# Altium PCB JLB_PCB.PcbDoc
Units mm, origin at the board's own origin, x right, y up, seen from the top; angles counter-clockwise.
Board outline 170 x 135 mm, 2 copper layers (Top Layer, Bottom Layer), stack 1.586 mm thick; 182 components, 147 nets, 745 pads, 0 vias.
Unrouted connection lines stored in the file: 470.
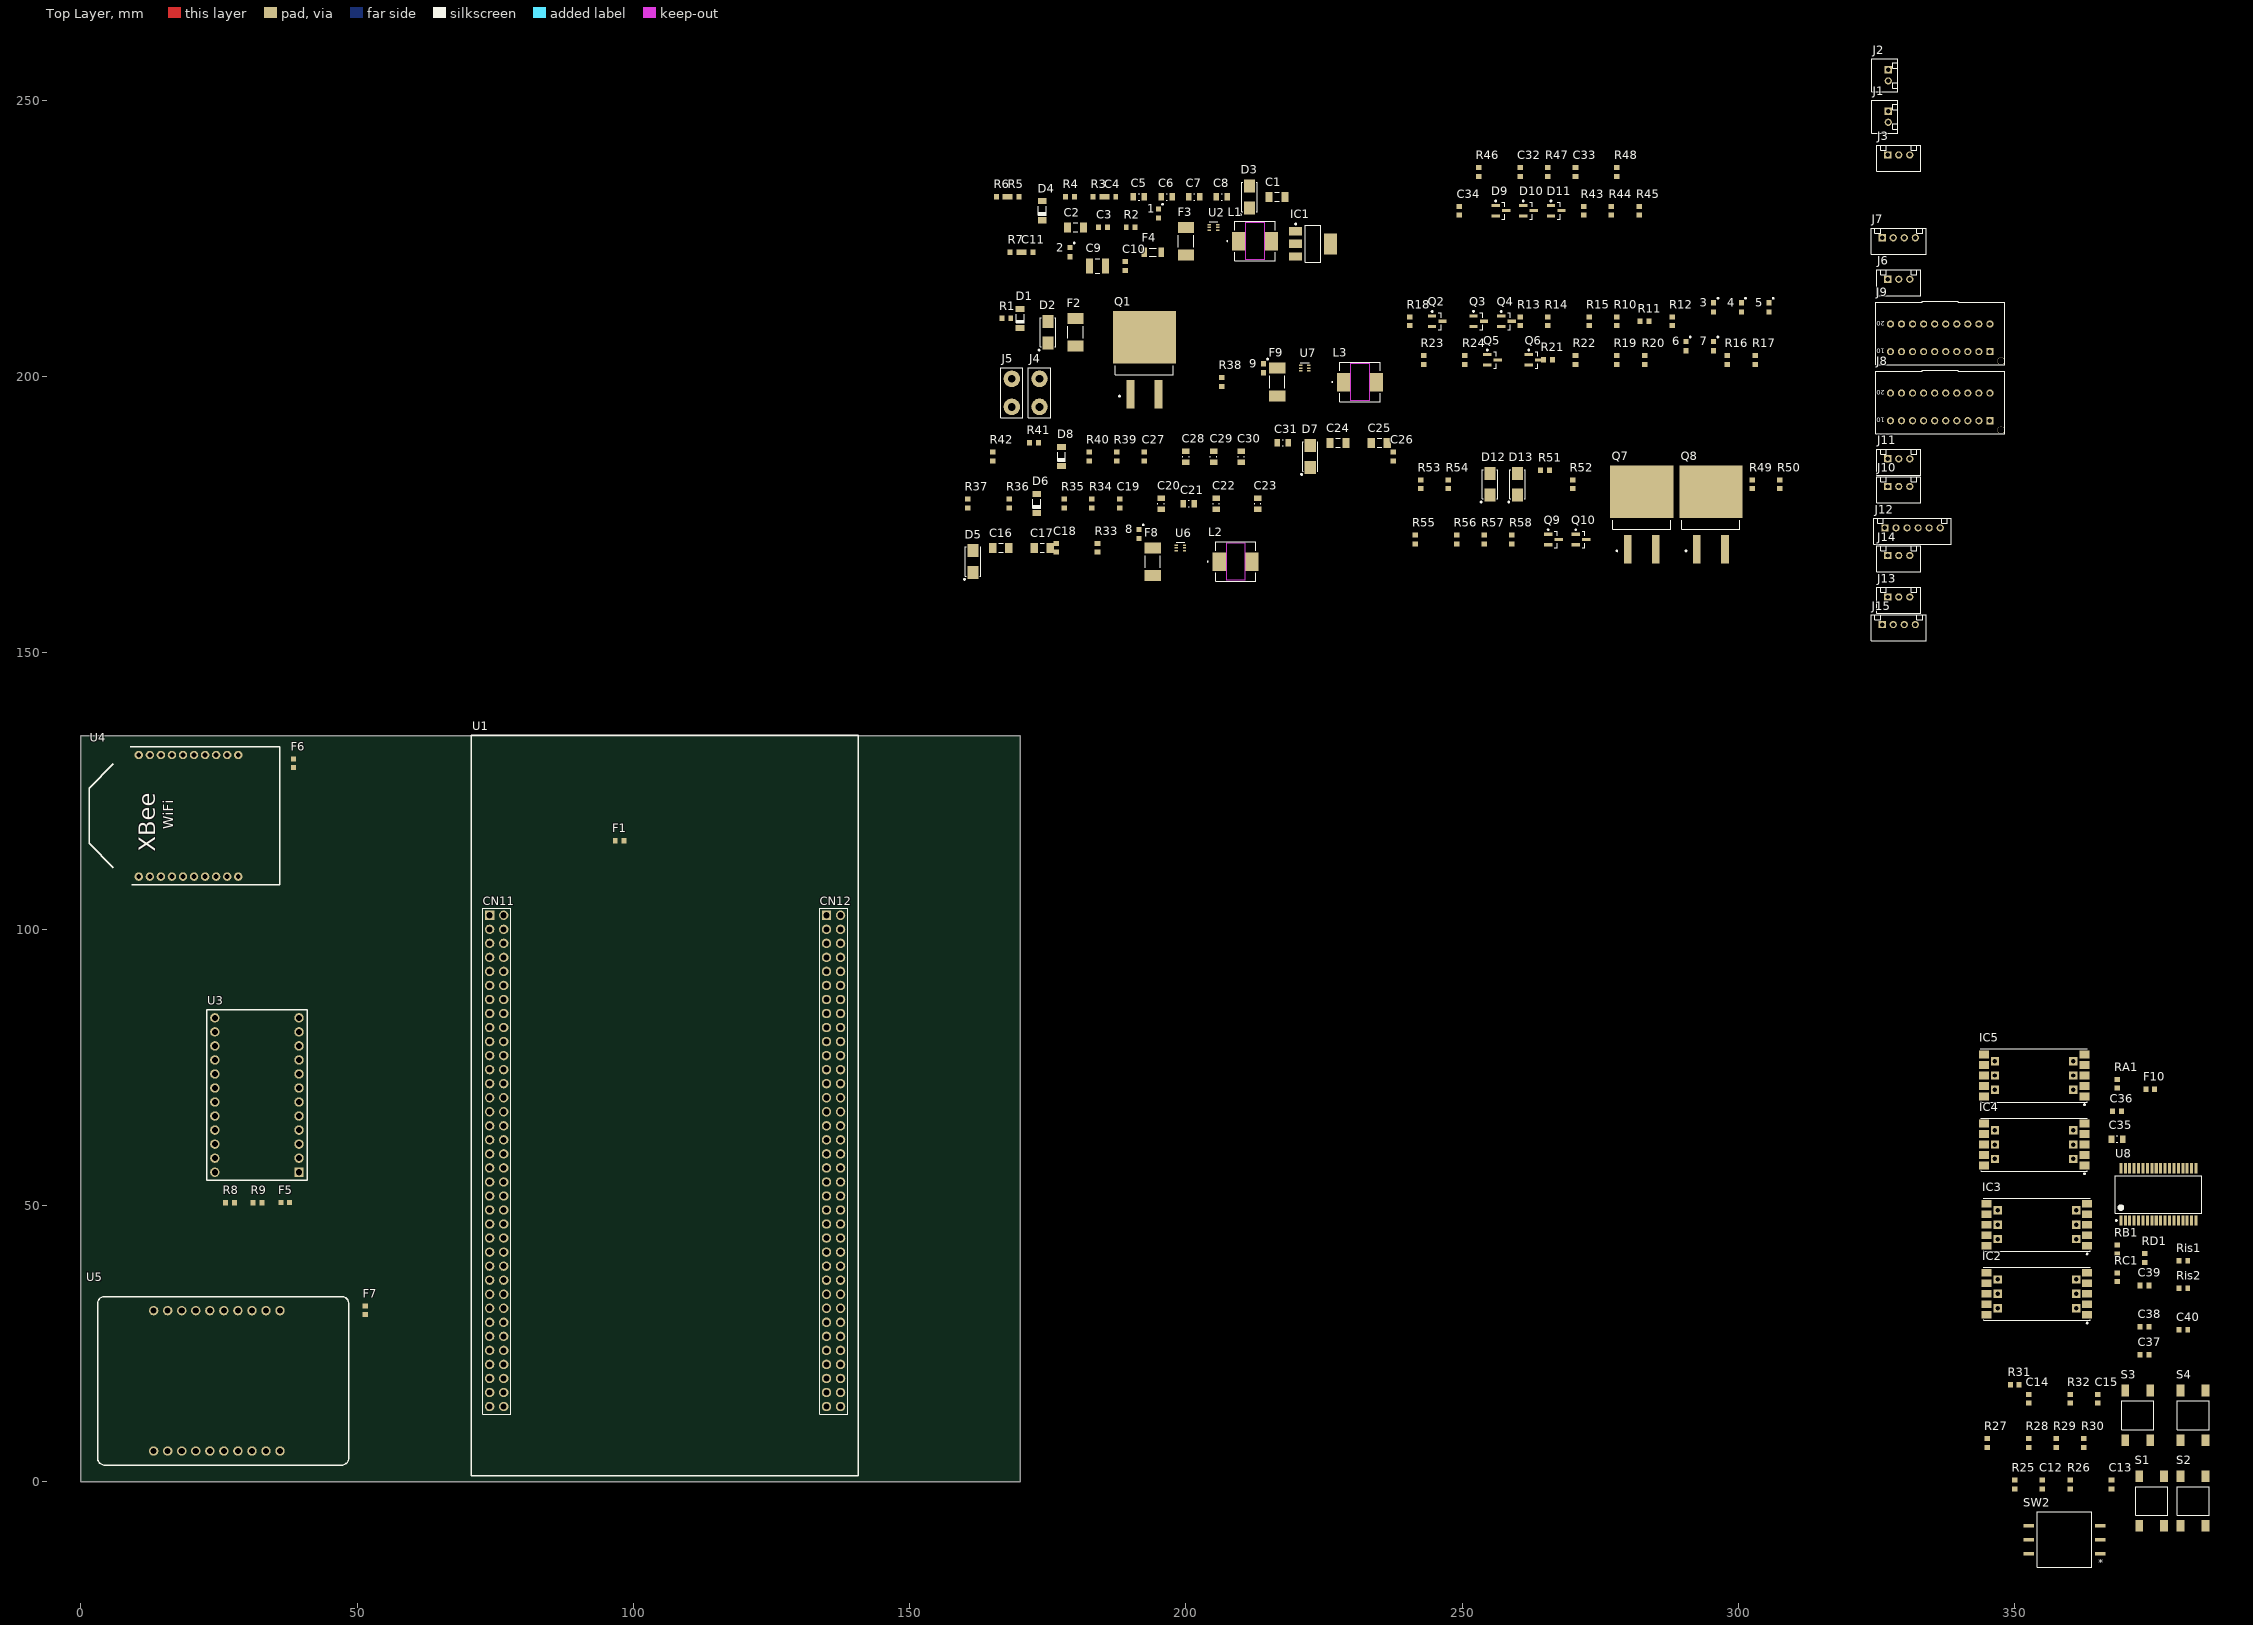
[diagram p0: Top Layer view]
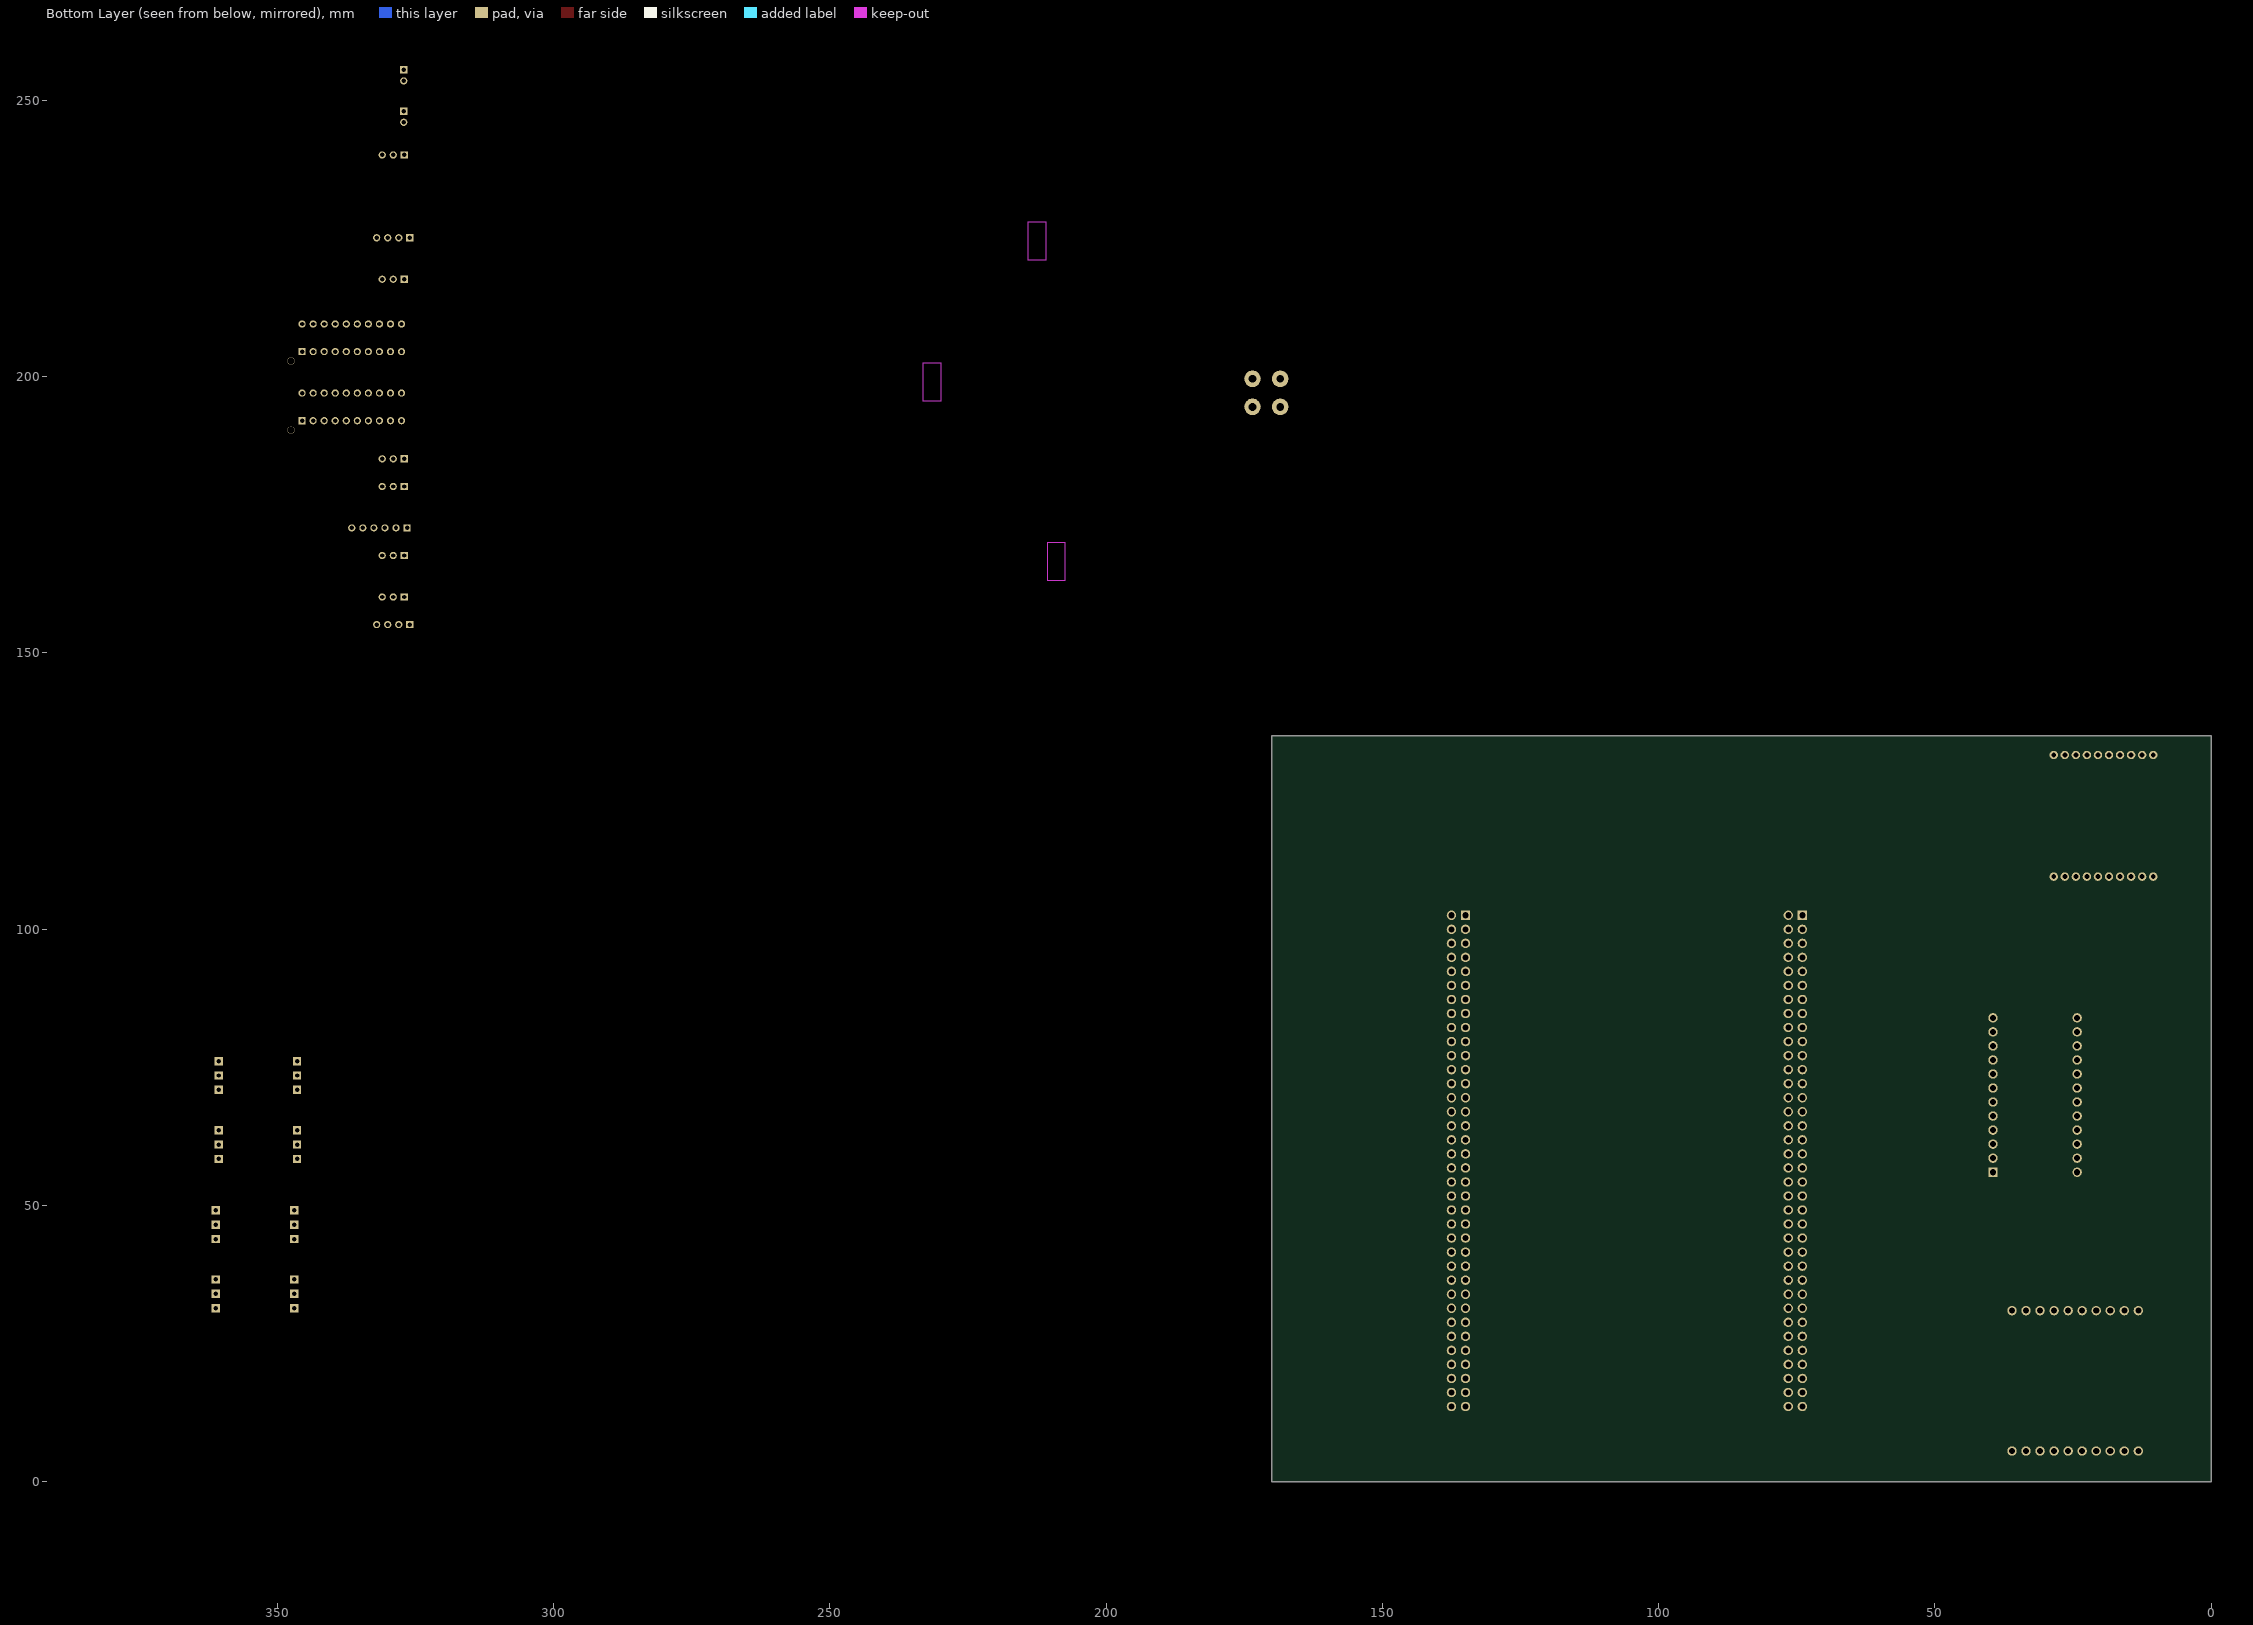
[diagram p1: Bottom Layer view, seen from below]

## Layer stack, top to bottom
Top Solder: solder mask 0.0102, Solder Resist, Dk 3.5
Top Layer: signal copper 0.018
Dielectric1: core 1.55, FR-4, Dk 4.8
Bottom Layer: signal copper 0.018
Bottom Solder: solder mask 0.0102, Solder Resist, Dk 3.5

## Board outline
0,0 0,135 170,135 170,0

## Design rules (kind name [scope] priority, off if disabled: settings)
BoardOutlineClearance [All] p1: gap=0.25 ignorepadtopadclearanceinfootprint=FALSE
Clearance Clearance-xPP-xTP-xTT [All] p1: gap=0.15 ignorepadtopadclearanceinfootprint=FALSE except(0: Arc-Hole Track-Hole SMDPad-Hole THPad-Hole Via-Hole Fill-Hole Poly-Hole Region-Hole Text-Hole; 0.2: Arc-Poly Track-Poly SMDPad-Poly THPad-Poly Via-Poly Fill-Poly Poly-Poly)
ComponentClearance [All] p1: gap=0.25 collisioncheckmode=3 verticalgap=0.25 showdistances=FALSE
DiffPairsRouting [All] p1: maxlimit=0.25 minlimit=0.25 mostfreqgap=0.25 toplayer_minwidth=0.381 toplayer_maxwidth=0.381 toplayer_prefwidth=0.381 bottomlayer_minwidth=0.381 bottomlayer_maxwidth=0.381 bottomlayer_prefwidth=0.381 maxuncoupledlength=12.5
Height [All] p1: minheight=0 maxheight=45 prefheight=12.5
HoleSize HoleSize-PTH [All] p1: absolutevalues=TRUE maxlimit=5 minlimit=0.25 maxpercent=80.000 minpercent=20.000
HoleToHoleClearance [All] p1: gap=0.4 allowstackedmicrovias=TRUE
MinimumAnnularRing [All] p1: minimumring=0.125
MinimumSolderMaskSliver [All] p1: minsoldermaskwidth=0.08
PasteMaskExpansion [All] p1: expansion=-0.2
PlaneClearance PlaneClearance-IPI [All] p1: clearance=0.2
PlaneConnect [All] p1: pad.planeconnectstyle=Relief pad.reliefexpansion=0.175 pad.reliefentries=4 pad.reliefconductorwidth=0.2 pad.reliefairgap=0.2 via.planeconnectstyle=Direct via.reliefexpansion=0.175 via.reliefentries=4 via.reliefconductorwidth=0.2 via.reliefairgap=0.2
PolygonConnect PolygonConnect-xTW [All] p1: thpad.connectstyle=Relief thpad.reliefconductorwidth=0.2 thpad.reliefentries=4 thpad.polygonreliefangle="90 Angle" thpad.airgapwidth=0.2 smdpad.connectstyle=Relief smdpad.reliefconductorwidth=0.2 smdpad.reliefentries=4 smdpad.polygonreliefangle="90 Angle" smdpad.airgapwidth=0.2 via.connectstyle=Direct via.reliefconductorwidth=0.2 via.reliefentries=4 via.polygonreliefangle="90 Angle" via.airgapwidth=0.2
RoutingCorners [All] p1: cornerstyle=45-Degree minsetback=2.5 maxsetback=2.5
RoutingVias [All] p1: holewidth=0.35 width=0.7 viastyle="Through Hole" minholewidth=0.25 minwidth=0.6 maxholewidth=1.2 maxwidth=1.6
SilkToSilkClearance [All] p1: silktosilkclearance=0.05
SilkToSolderMaskClearance SilkscreenOverComponentPads [IsPad] p1: minsilkscreentomaskgap=0.15 clearancetoexposedcopper=TRUE
SolderMaskExpansion [All] p1: expansion=0 istentingtop=FALSE
UnRoutedNet [All] p1: checkbadconnections=TRUE
Width Width-xTW [All] p1: maxlimit=3 minlimit=0.15 preferedwidth=0.2
17 further rules are at their usual default settings.

## Classes and differential pairs
component class Telemetry_Module: F6 U4
component class Supply_Protection: D1 D2 F2 Q1 R1 SW1
component class Rear_Servo_Supply: 9 C24 C25 C26 C27 C28 C29 C30 C31 D7 D8 F9 L3 R38 R39 R40 R41 R42 U7
component class Radio_Module: F7 U5
component class Measurements: C32 C33 C34 D9 D10 D11 R43 R44 R45 R46 R47 R48
component class MCU: F1 U1
component class MainSheet: J1 J2 J3 J4 J5 J6 J7 J8 J9 J10 J11 J12 J13 J14 J15
component class LEDs: 3 4 5 6 7 Q2 Q3 Q4 Q5 Q6 R10 R11 R12 R13 R14 R15 R16 R17 R18 R19 R20 R21 R22 R23 R24
component class IMU: F5 R8 R9 U3
component class Front_Servo_Supply: 8 C16 C17 C18 C19 C20 C21 C22 C23 D5 D6 F8 L2 R33 R34 R35 R36 R37 U6
component class Enable_Signals: D12 D13 Q7 Q8 Q9 Q10 R49 R50 R51 R52 R53 R54 R55 R56 R57 R58
component class Display: C35 C36 C37 C38 C39 C40 F10 IC2 IC3 IC4 IC5 RA1 RB1 RC1 RD1 Ris1 Ris2 U8
component class "Buttons & Rotary": C12 C13 C14 C15 R25 R26 R27 R28 R29 R30 R31 R32 S1 S2 S3 S4 SW2
component class 5V_Supply: 1 C1 C2 C3 C4 C5 C6 C7 C8 D3 D4 F3 L1 R2 R3 R4 R5 R6 U2
component class 3V3_Supply: 2 C9 C10 C11 F4 IC1 R7

## Components (designator, comment, footprint, x,y, rotation, side; value= is the part's Value field where it differs from the comment)
1 "0603" LED_0603 195,229.5 r90 top
2 "0603" LED_0603 179,222.5 r90 top value=Green
3 "0603" LED_0603 295.5,212.5 r90 top
4 "0603" LED_0603 300.5,212.5 r90 top
5 "0603" LED_0603 305.5,212.5 r90 top
6 "0603" LED_0603 290.5,205.5 r90 top
7 "0603" LED_0603 295.5,205.5 r90 top
8 "0603" LED_0603 191.5,171.5 r90 top
9 "0603" LED_0603 214,201.5 r90 top
C1 "1206" C_1206 216.5,232.5 r0 top value=10uF
C2 "1206" C_1206 180,227 r0 top value=10uF
C3 "0603" C_0603 185,227 r0 top value=100nF
C4 "0603" C_0603 186.5,232.5 r0 top value=33pF
C5 "0805" C_0805 191.5,232.5 r0 top value=22uF
C6 "0805" C_0805 196.5,232.5 r0 top value=22uF
C7 "0805" C_0805 201.5,232.5 r0 top value=22uF
C8 "0805" C_0805 206.5,232.5 r0 top value=22uF
C9 "1210" C_1210 184,220 r0 top value=100uF
C10 "0603" C_0603 189,220 r90 top value=1.0uF
C11 "0603" C_0603 171.5,222.5 r0 top value=1.0uF
C12 "0603" C_0603 355,-0.5 r90 top value=100nF
C13 "0603" C_0603 367.5,-0.5 r90 top value=100nF
C14 "0603" C_0603 352.5,15 r90 top value=100nF
C15 "0603" C_0603 365,15 r90 top value=100nF
C16 "1206" C_1206 166.5,169 r0 top value=10uF
C17 "1206" C_1206 174,169 r0 top value=10uF
C18 "0603" C_0603 176.5,169 r90 top value=100nF
C19 "0603" C_0603 188,177 r90 top value=33pF
C20 "0805" C_0805 195.5,177 r90 top value=22uF
C21 "0805" C_0805 200.5,177 r0 top value=22uF
C22 "0805" C_0805 205.5,177 r90 top value=22uF
C23 "0805" C_0805 213,177 r90 top value=22uF
C24 "1206" C_1206 227.5,188 r0 top value=10uF
C25 "1206" C_1206 235,188 r0 top value=10uF
C26 "0603" C_0603 237.5,185.5 r90 top value=100nF
C27 "0603" C_0603 192.5,185.5 r90 top value=33pF
C28 "0805" C_0805 200,185.5 r90 top value=22uF
C29 "0805" C_0805 205,185.5 r90 top value=22uF
C30 "0805" C_0805 210,185.5 r90 top value=22uF
C31 "0805" C_0805 217.5,188 r0 top value=22uF
C32 "0603" C_0603 260.5,237 r90 top value=33nF
C33 "0603" C_0603 270.5,237 r90 top value=33nF
C34 "0603" C_0603 249.5,230 r90 top value=33nF
C35 "0805" C_0805 368.5,62 r180 top value=47uF
C36 "0603" C_0603 368.5,67 r180 top value=100nF
C37 "0603" C_0603 373.5,23 r180 top value=33pF
C38 "0603" C_0603 373.5,28 r180 top value=33pF
C39 "0603" C_0603 373.5,35.5 r180 top value=33pF
C40 "0603" C_0603 380.5,27.5 r180 top value=18pF
D1 "SOD-80" SOD-80 170,210.5 r90 top value=4.7V
D2 "SMA" SMA 175,208 r90 top value=14V
D3 "SMA" SMA 211.5,232.5 r90 top value=6.7V
D4 "SOD-80" SOD-80 174,230 r90 top value=5.6V
D5 "SMA" SMA 161.5,166.5 r90 top value=6.7V
D6 "SOD-80" SOD-80 173,177 r90 top value=5.6V
D7 "SMA" SMA 222.5,185.5 r90 top value=6.7V
D8 "SOD-80" SOD-80 177.5,185.5 r90 top value=5.6V
D9 "SOT-23-3" SOT-23-3 257,230 r0 top value=40V
D10 "SOT-23-3" SOT-23-3 262,230 r0 top value=40V
D11 "SOT-23-3" SOT-23-3 267,230 r0 top value=40V
D12 "SMA" SMA 255,180.5 r90 top value=40V
D13 "SMA" SMA 260,180.5 r90 top value=40V
F1 "Fuse" F_0603 97.5,116 r0 top value=500mA
F2 "Fuse" F_2410 180,208 r90 top value=3A
F3 "Fuse" F_2410 200,224.5 r90 top value=3A
F4 "Fuse" FUSE_1206 194,222.5 r0 top value=1A
F5 "Fuse" F_0603 37,50.5 r0 top value=500mA
F6 "Fuse" F_0603 38.5,130 r90 top value=500mA
F7 "Fuse" F_0603 51.5,31 r90 top value=500mA
F8 "Fuse" F_2410 194,166.5 r90 top value=3A
F9 "Fuse" F_2410 216.5,199 r90 top value=3A
F10 "Fuse" F_0603 374.5,71 r180 top value=1A
IC1 "TLV1117LV33DCYR" SOT-223 223,224 r0 top
IC2 "KCPSC04-106" KCPSC04-106 354,34 r90 top
IC3 "KCPSC04-106" KCPSC04-106 354,46.5 r90 top
IC4 "KCPSC04-106" KCPSC04-106 353.5,61 r90 top
IC5 "KCPSC04-106" KCPSC04-106 353.5,73.5 r90 top
J1 "62000211622" 62000211622 326.5,247 r90 top
J2 "62000211622" 62000211622 326.5,254.5 r90 top
J3 "62000311622" 62000311622 329,239.5 r180 top
J4 "Socket" "TAB 6.35MM x 0.81MM" 173.5,194.5 r90 top
J5 "Socket" "TAB 6.35MM x 0.81MM" 168.5,194.5 r90 top
J6 "62000311622" 62000311622 329,217 r180 top
J7 "62000411622" 62000411622 329,224.5 r180 top
J8 "62402021622" 62402021622 336.5,194.5 r180 top
J9 "62402021622" 62402021622 336.5,207 r180 top
J10 "62000311622" 62000311622 329,179.5 r180 top
J11 "62000311622" 62000311622 329,184.5 r180 top
J12 "62000611622" 62000611622 331.5,172 r180 top
J13 "62000311622" 62000311622 329,159.5 r180 top
J14 "62000311622" 62000311622 329,167 r180 top
J15 "62000411622" 62000411622 329,154.5 r180 top
L1 "SRP7028A-6R8M" IND_SRP7028A-6R8M_BRN 212.5,224.5 r0 top
L2 "SRP7028A-6R8M" IND_SRP7028A-6R8M_BRN 209,166.5 r0 top
L3 "SRP7028A-6R8M" IND_SRP7028A-6R8M_BRN 231.5,199 r0 top
Q1 "IRF5305SPBF" D2PAK-2 192.5,203.5 r90 top value=55V
Q2 "SI2306BDS-T1-E3" SOT-23-3 245.5,210 r0 top value=30V
Q3 "SI2306BDS-T1-E3" SOT-23-3 253,210 r0 top value=30V
Q4 "SI2306BDS-T1-E3" SOT-23-3 258,210 r0 top value=30V
Q5 "SI2306BDS-T1-E3" SOT-23-3 255.5,203 r0 top value=30V
Q6 "SI2306BDS-T1-E3" SOT-23-3 263,203 r0 top value=30V
Q7 "IRF5305SPBF" D2PAK-2 282.5,175.5 r90 top value=55V
Q8 "IRF5305SPBF" D2PAK-2 295,175.5 r90 top value=55V
Q9 "SI2306BDS-T1-E3" SOT-23-3 266.5,170.5 r0 top value=30V
Q10 "SI2306BDS-T1-E3" SOT-23-3 271.5,170.5 r0 top value=30V
R1 "0603" R_0603 167.5,210.5 r0 top value=10K0
R2 "0603" R_0603 190,227 r0 top value=39K0
R3 "0603" R_0603 184,232.5 r0 top value=220K
R4 "0603" R_0603 179,232.5 r0 top value=360R
R5 "0603" R_0603 169,232.5 r0 top value=30K0
R6 "0603" R_0603 166.5,232.5 r0 top value=30K0
R7 "0603" R_0603 169,222.5 r0 top value=240R
R8 "0603" R_0603 27,50.5 r0 top value=10K0
R9 "0603" R_0603 32,50.5 r0 top value=10K0
R10 "0603" R_0603 278,210 r90 top value=360R
R11 "0603" R_0603 283,210 r0 top value=360R
R12 "0603" R_0603 288,210 r90 top value=360R
R13 "0603" R_0603 260.5,210 r90 top value=1K00
R14 "0603" R_0603 265.5,210 r90 top value=1K00
R15 "0603" R_0603 273,210 r90 top value=1K00
R16 "0603" R_0603 298,203 r90 top value=390K
R17 "0603" R_0603 303,203 r90 top value=390K
R18 "0603" R_0603 240.5,210 r90 top value=390K
R19 "0603" R_0603 278,203 r90 top value=360R
R20 "0603" R_0603 283,203 r90 top value=360R
R21 "0603" R_0603 265.5,203 r0 top value=1K00
R22 "0603" R_0603 270.5,203 r90 top value=1K00
R23 "0603" R_0603 243,203 r90 top value=390K
R24 "0603" R_0603 250.5,203 r90 top value=390K
R25 "0603" R_0603 350,-0.5 r90 top value=10K0
R26 "0603" R_0603 360,-0.5 r90 top value=10K0
R27 "0603" R_0603 345,7 r90 top value=10K0
R28 "0603" R_0603 352.5,7 r90 top value=10K0
R29 "0603" R_0603 357.5,7 r90 top value=10K0
R30 "0603" R_0603 362.5,7 r90 top value=10K0
R31 "0603" R_0603 350,17.5 r0 top value=10K0
R32 "0603" R_0603 360,15 r90 top value=10K0
R33 "0603" R_0603 184,169 r90 top value=39K0
R34 "0603" R_0603 183,177 r90 top value=390K
R35 "0603" R_0603 178,177 r90 top value=560R
R36 "0603" R_0603 168,177 r90 top value=30K0
R37 "0603" R_0603 160.5,177 r90 top value=30K0
R38 "0603" R_0603 206.5,199 r90 top value=39K0
R39 "0603" R_0603 187.5,185.5 r90 top value=390K
R40 "0603" R_0603 182.5,185.5 r90 top value=560R
R41 "0603" R_0603 172.5,188 r0 top value=30K0
R42 "0603" R_0603 165,185.5 r90 top value=30K0
R43 "0603" R_0603 272,230 r90 top value=91K0
R44 "0603" R_0603 277,230 r90 top value=20K0
R45 "0603" R_0603 282,230 r90 top value=20K0
R46 "0603" R_0603 253,237 r90 top value=30K0
R47 "0603" R_0603 265.5,237 r90 top value=30K0
R48 "0603" R_0603 278,237 r90 top value=30K0
R49 "0603" R_0603 302.5,180.5 r90 top value=91K0
R50 "0603" R_0603 307.5,180.5 r90 top value=91K0
R51 "0603" R_0603 265,183 r0 top value=91K0
R52 "0603" R_0603 270,180.5 r90 top value=91K0
R53 "0603" R_0603 242.5,180.5 r90 top value=1K00
R54 "0603" R_0603 247.5,180.5 r90 top value=1K00
R55 "0603" R_0603 241.5,170.5 r90 top value=390K
R56 "0603" R_0603 249,170.5 r90 top value=390K
R57 "0603" R_0603 254,170.5 r90 top value=390K
R58 "0603" R_0603 259,170.5 r90 top value=390K
RA1 "0603" R_0603 368.5,72 r90 top value=150K
RB1 "0603" R_0603 368.5,42 r90 top value=300K
RC1 "0603" R_0603 368.5,37 r90 top value=620K
RD1 "0603" R_0603 373.5,40.5 r90 top value=1.3M
Ris1 "0603" R_0603 380.5,40 r180 top value=1M
Ris2 "0603" R_0603 380.5,35 r180 top value=0
S1 "Button" Switch 372.5,-8 r90 top
S2 "Button" Switch 380,-8 r90 top
S3 "Button" Switch 370,7.5 r90 top
S4 "Button" Switch 380,7.5 r90 top
SW2 "MCRM3HAF-10R-V-B" MCRM3H_MTC 359,-10.5 r180 top
U1 "NUCLEO-L552" FP_NUCLEO-144 74,102.5 r0 top
U2 "TPS564257DRLR" TPS564242DRLR_TEX 205,227 r0 top
U3 "MKI178V1" FP_DIL24 39.5,56 r0 top
U4 "XB2B-WFUT-001" "XBee (WiFi)" 19.5,120.5 r90 top
U5 "SLTB004A" SLTB004A 48.5,3 r90 top
U6 "TPS564257DRLR" TPS564242DRLR_TEX 199,169 r0 top
U7 "TPS564257DRLR" TPS564242DRLR_TEX 221.5,201.5 r0 top
U8 "MAX6954AAX+" TSSOP-36 376,52 r90 top

## Footprints (in the part's own frame and the unit in brackets; to place one, negate y for a bottom-side part, rotate by r counter-clockwise, add the part's x,y. Pads: shape width x height; smd on the part's side, far side on the other; paste and mask are expansions set on the pad)
62000211622 [mm] "2.00mm Male Vertical Shrouded Header, 2p"
  rect 1.3x1.3 hole 0.8: 1(1,-0.6)
  round 1.3 hole 0.8: 2(-1,-0.6)
  silkscreen extent -3,-2.35 3,2.35, body extent -3,-2.35 3,2.35, height 6.15
62000311622 [mm] "2.00mm Male Vertical Shrouded Header, 3p"
  rect 1.3x1.3 hole 0.8: 1(2,-0.6)
  round 1.3 hole 0.8: 2(0,-0.6) 3(-2,-0.6)
  silkscreen extent -4,-2.35 4,2.35, body extent -4,-2.35 4,2.35, height 6.15
62000411622 [mm] "2.00mm Male Vertical Shrouded Header, 4p"
  rect 1.3x1.3 hole 0.8: 1(3,-0.6)
  round 1.3 hole 0.8: 2(1,-0.6) 3(-1,-0.6) 4(-3,-0.6)
  silkscreen extent -5,-2.35 5,2.35, body extent -5,-2.4 5,2.3, height 6.15
62000611622 [mm] "2.00mm Male Vertical Shrouded Header, 6p"
  rect 1.3x1.3 hole 0.8: 1(5,-0.6)
  round 1.3 hole 0.8: 2(3,-0.6) 3(1,-0.6) 4(-1,-0.6) 5(-3,-0.6) 6(-5,-0.6)
  silkscreen extent -7,-2.35 7,2.35, body extent -7,-2.35 7,2.3, height 6.12
62402021622 [mm] "2.00mm Male Dual Row Vertical Shrouded Header with positive locking, 20p"
  rect 1.3x1.3 hole 0.8: 1(-9,2.5)
  round 1.3 hole 0.8: 2(-7,2.5) 3(-5,2.5) 4(-3,2.5) 5(-1,2.5) 6(1,2.5) 7(3,2.5) 8(5,2.5) 9(7,2.5) 10(9,2.5) 11(-9,-2.5) 12(-7,-2.5) 13(-5,-2.5) 14(-3,-2.5) 15(-1,-2.5) 16(1,-2.5) 17(3,-2.5) 18(5,-2.5) 19(7,-2.5) 20(9,-2.5)
  round 1.3 hole 1.3 unplated: M1(-11,4.2)
  silkscreen extent -11.7,-6.65 11.7,4.85, body extent -11.7,-6.65 11.7,4.85, height 9.82
C_0603 [mm] "Chip Resistor, 2-Leads, Body 1,60x0,80mm, IPC Medium Density"
  rect 0.9x1 smd: 1(-0.8,0) 2(0.8,0)
  body extent -0.8,-0.4 0.8,0.4, height 0.77
C_0805 [mm] "Chip Resistor, 2-Leads, Body 2,00x1,25mm, IPC Medium Density"
  rect 1x1.35 smd: 1(-1,0) 2(1,0)
  silkscreen extent -0.1,-0.58 0.1,0.58, body extent -1,-0.62 1,0.63, height 0.58
C_1206 [mm] "Chip Resistor, 2-Leads, Body 3,20x1,60mm, IPC Medium Density"
  rect 1.3x1.8 smd: 1(-1.45,0) 2(1.45,0)
  silkscreen extent -0.4,-0.8 0.4,0.8, body extent -1.6,-0.8 1.6,0.8, height 0.76
C_1210 [mm] "Chip Resistor, 2-Leads, Body 3,20x2,50mm, IPC Medium Density"
  rect 1.3x2.75 smd: 1(-1.45,0) 2(1.45,0)
  silkscreen extent -0.4,-1.27 0.4,1.28, body extent -1.6,-1.25 1.6,1.25, height 0.76
D2PAK-2 [mm]
  rect 5.15x1.4 smd: 1(-6.75,2.54) 2(-6.75,-2.54)
  rect 9.5x11.43 smd: 3(3.6,0)
  silkscreen extent -7.17,-5.25 -1.55,5.25, body extent -7.76,-5.08 7.5,5.08, height 4.92
F_0603 [mm]
  rect 0.9x0.95 smd: 1(-0.775,0) 2(0.775,0)
  body extent -0.78,-0.45 0.78,0.45, height 0.44
F_2410 [mm]
  rect 2x2.95 smd: 1(-2.5,0) 2(2.5,0)
  silkscreen extent -1.1,-1.37 1.1,1.38, body extent -3.15,-1.47 3.15,1.47, height 2.94
FP_DIL24 [mm] "DIL24"
  rect 1.7x1.7 hole 1.1: 1(0,0)
  round 1.7 hole 1.1: 2(0,2.54) 3(0,5.08) 4(0,7.62) 5(0,10.16) 6(0,12.7) 7(0,15.24) 8(0,17.78) 9(0,20.32) 10(0,22.86) 11(0,25.4) 12(0,27.94) 13(-15.24,27.94) 14(-15.24,25.4) 15(-15.24,22.86) 16(-15.24,20.32) 17(-15.24,17.78) 18(-15.24,15.24) 19(-15.24,12.7) 20(-15.24,10.16) 21(-15.24,7.62) 22(-15.24,5.08) 23(-15.24,2.54) 24(-15.24,0)
  silkscreen extent -16.7,-1.45 1.45,29.38, body extent -16.52,-1.28 1.28,29.21, height 4.86
FP_NUCLEO-144 [mm]
  rect 1.7x1.7 hole 1.1: 1(0,0) 73(60.96,0)
  round 1.7 hole 1.1: 2(2.54,0) 3(0,-2.54) 4(2.54,-2.54) 5(0,-5.08) 6(2.54,-5.08) 7(0,-7.62) 8(2.54,-7.62) 9(0,-10.16) 10(2.54,-10.16) 11(0,-12.7) 12(2.54,-12.7) 13(0,-15.24) 14(2.54,-15.24) 15(0,-17.78) 16(2.54,-17.78) 17(0,-20.32) 18(2.54,-20.32) 19(0,-22.86) 20(2.54,-22.86) 21(0,-25.4) 22(2.54,-25.4) 23(0,-27.94) 24(2.54,-27.94) 25(0,-30.48) 26(2.54,-30.48) 27(0,-33.02) 28(2.54,-33.02) 29(0,-35.56) 30(2.54,-35.56) 31(0,-38.1) 32(2.54,-38.1) 33(0,-40.64) 34(2.54,-40.64) 35(0,-43.18) 36(2.54,-43.18) 37(0,-45.72) 38(2.54,-45.72) 39(0,-48.26) 40(2.54,-48.26) 41(0,-50.8) 42(2.54,-50.8) 43(0,-53.34) 44(2.54,-53.34) 45(0,-55.88) 46(2.54,-55.88) 47(0,-58.42) 48(2.54,-58.42) 49(0,-60.96) 50(2.54,-60.96) 51(0,-63.5) 52(2.54,-63.5) 53(0,-66.04) 54(2.54,-66.04) 55(0,-68.58) 56(2.54,-68.58) 57(0,-71.12) 58(2.54,-71.12) 59(0,-73.66) 60(2.54,-73.66) 61(0,-76.2) 62(2.54,-76.2) 63(0,-78.74) 64(2.54,-78.74) 65(0,-81.28) 66(2.54,-81.28) 67(0,-83.82) 68(2.54,-83.82) 69(0,-86.36) 70(2.54,-86.36) 71(0,-88.9) 72(2.54,-88.9) 74(63.5,0) 75(60.96,-2.54) 76(63.5,-2.54) 77(60.96,-5.08) 78(63.5,-5.08) 79(60.96,-7.62) 80(63.5,-7.62) 81(60.96,-10.16) 82(63.5,-10.16) 83(60.96,-12.7) 84(63.5,-12.7) 85(60.96,-15.24) 86(63.5,-15.24) 87(60.96,-17.78) 88(63.5,-17.78) 89(60.96,-20.32) 90(63.5,-20.32) 91(60.96,-22.86) 92(63.5,-22.86) 93(60.96,-25.4) 94(63.5,-25.4) 95(60.96,-27.94) 96(63.5,-27.94) 97(60.96,-30.48) 98(63.5,-30.48) 99(60.96,-33.02) 100(63.5,-33.02) 101(60.96,-35.56) 102(63.5,-35.56) 103(60.96,-38.1) 104(63.5,-38.1) 105(60.96,-40.64) 106(63.5,-40.64) 107(60.96,-43.18) 108(63.5,-43.18) 109(60.96,-45.72) 110(63.5,-45.72) 111(60.96,-48.26) 112(63.5,-48.26) 113(60.96,-50.8) 114(63.5,-50.8) 115(60.96,-53.34) 116(63.5,-53.34) 117(60.96,-55.88) 118(63.5,-55.88) 119(60.96,-58.42) 120(63.5,-58.42) 121(60.96,-60.96) 122(63.5,-60.96) 123(60.96,-63.5) 124(63.5,-63.5) 125(60.96,-66.04) 126(63.5,-66.04) 127(60.96,-68.58) 128(63.5,-68.58) 129(60.96,-71.12) 130(63.5,-71.12) 131(60.96,-73.66) 132(63.5,-73.66) 133(60.96,-76.2) 134(63.5,-76.2) 135(60.96,-78.74) 136(63.5,-78.74) 137(60.96,-81.28) 138(63.5,-81.28) 139(60.96,-83.82) 140(63.5,-83.82) 141(60.96,-86.36) 142(63.5,-86.36) 143(60.96,-88.9) 144(63.5,-88.9)
  silkscreen extent -3.3,-101.4 66.72,32.6, body extent -3.3,-101.4 66.7,32.6, height 14
FUSE_1206 [mm] "SMD Fuse, 2-Leads, Body 3,20x1,60mm, IPC Medium Density"
  rect 1x1.7 smd: 1(-1.5,0) 2(1.5,0)
  silkscreen extent -0.6,-0.75 0.6,0.75, body extent -1.6,-0.8 1.6,0.8, height 1
IND_SRP7028A-6R8M_BRN [mm]
  rect 2.458x3.352 smd paste+0 mask+0.05: 1(-2.918,0) 2(2.918,0)
  Top Layer keep-out region: -1.638,-3.404 -1.638,3.404 1.638,3.404 1.638,-3.404
  Keep-Out Layer region: -1.638,-3.404 -1.638,3.404 1.638,3.404 1.638,-3.404
  silkscreen extent -5.11,-3.58 3.63,3.58
KCPSC04-106 [mm]
  rect 1.4x1.8 smd: 1(-3.8,-9.1) 2(-1.9,-9.1) 3(0,-9.1) 4(1.9,-9.1) 5(3.8,-9.1) 12(3.8,9.1) 13(1.9,9.1) 14(0,9.1) 15(-1.9,9.1) 16(-3.8,9.1)
  rect 1.5x1.5 hole 0.8: 6(2.6,-7.1) 7(0,-7.1) 8(-2.6,-7.1) 9(-2.6,7.1) 10(0,7.1) 11(2.6,7.1)
  silkscreen extent -5.4,-9.65 4.8,9.65, body extent -4.65,-9.5 4.65,9.5, height 3.76
LED_0603 [mm]
  rect 0.95x0.9 smd: 1(0.825,0) 2(-0.825,0)
  silkscreen extent 1.55,-0.87 1.75,-0.68, body extent -0.8,-0.4 0.8,0.4, height 0.38
MCRM3H_MTC [mil]
  rect 75x24 smd paste+0 mask+0: 1(-254,100) 2(-254,0) 3(-254,-100) 4(254,-100) 5(254,0) 6(254,100)
  silkscreen extent -194,-198 194,198
R_0603 [mm] "Chip Resistor, 2-Leads, Body 1,60x0,80mm, IPC Medium Density"
  rect 0.9x1 smd: 1(-0.8,0) 2(0.8,0)
  body extent -0.8,-0.4 0.8,0.4, height 0.44
SLTB004A [mm] "Thunderboard Sense 2 module"
  round 1.7 hole 1.1: 1(2.54,35.306) 2(27.94,35.306) 3(2.54,32.766) 4(27.94,32.766) 5(2.54,30.226) 6(27.94,30.226) 7(2.54,27.686) 8(27.94,27.686) 9(2.54,25.146) 10(27.94,25.146) 11(2.54,22.606) 12(27.94,22.606) 13(2.54,20.066) 14(27.94,20.066) 15(2.54,17.526) 16(27.94,17.526) 17(2.54,14.986) 18(27.94,14.986) 19(2.54,12.446) 20(27.94,12.446)
  Top Layer pour cut-out: -2.032,38.1 -2.032,47.752 32.512,47.752 32.512,38.1
  Bottom Layer pour cut-out: -2.032,38.1 -2.032,47.752 32.512,47.752 32.512,38.1
  silkscreen extent 0,0 30.48,45.47, body extent 0,0 30.5,45.5, height 8.7
SMA [mm]
  rect 2.35x2 smd: 1(-1.975,0) 2(1.975,0)
  silkscreen extent -3.35,-1.4 2.65,1.7, body extent -2.75,-1.4 2.75,1.4, height 2.6
SOD-80 [mm]
  rect 1.1x1.6 smd: 1(-1.725,0) 2(1.725,0)
  silkscreen extent -0.8,-0.7 0.8,0.7, body extent -1.85,-0.72 1.85,0.72, height 1.45
SOT-23-3 [mm] "SOT23, 3-Leads, Body 2,90x2,45mm, Pitch 0,95mm, IPC Medium Density"
  rect 1.5x0.55 smd: 1(-0.95,0.95) 2(-0.95,-0.95) 3(0.95,0)
  silkscreen extent -1.07,-1.5 0.7,1.9, body extent -1.4,-1.45 1.4,1.45, height 1.3
SOT-223 [mm] "SOT223, 4-Leads, Body 6,50x7,00mm (avg), Pitch 2,30mm, IPC Medium Density"
  rect 2.4x1.5 smd: 1(-3.15,2.3) 2(-3.15,0) 3(-3.15,-2.3)
  rect 2.4x3.8 smd: 4(3.15,0)
  silkscreen extent -3.27,-3.35 1.4,3.72, body extent -1.85,-3.35 1.85,3.35, height 1.8
Switch [mm]
  rect 2.1x1.4 smd: 1(0,0) 1(0,-4.5) 2(9,-4.5) 2(9,0)
  silkscreen extent 1.89,-5.16 7.11,0.64, body extent 0.02,-5.25 9.02,0.75, height 5
"TAB 6.35MM x 0.81MM" [mm]
  round 3 hole 1.4: 1(0,0) 1(5.08,0)
  silkscreen extent -2,-2 7.1,2, body extent -1.42,-1.54 6.5,1.54, height 10.53
TPS564242DRLR_TEX [mil]
  rect 24x11 smd paste+0 mask+1: 1(-29.5,19.69) 2(-29.5,0) 3(-29.5,-19.69) 4(29.5,-19.69) 5(29.5,0) 6(29.5,19.69)
  silkscreen extent -30,38 30,38, body extent -34,-34 34,34, height 24
TSSOP-36 [mm]
  rect 1.85x0.55 smd: 1(-4.725,6.8) 2(-4.725,6) 3(-4.725,5.2) 4(-4.725,4.4) 5(-4.725,3.6) 6(-4.725,2.8) 7(-4.725,2) 8(-4.725,1.2) 9(-4.725,0.4) 10(-4.725,-0.4) 11(-4.725,-1.2) 12(-4.725,-2) 13(-4.725,-2.8) 14(-4.725,-3.6) 15(-4.725,-4.4) 16(-4.725,-5.2) 17(-4.725,-6) 18(-4.725,-6.8) 19(4.725,-6.8) 20(4.725,-6) 21(4.725,-5.2) 22(4.725,-4.4) 23(4.725,-3.6) 24(4.725,-2.8) 25(4.725,-2) 26(4.725,-1.2) 27(4.725,-0.4) 28(4.725,0.4) 29(4.725,1.2) 30(4.725,2) 31(4.725,2.8) 32(4.725,3.6) 33(4.725,4.4) 34(4.725,5.2) 35(4.725,6) 36(4.725,6.8)
  silkscreen extent -4.85,-7.8 3.4,7.8, body extent -5.25,-7.77 5.25,7.77, height 2.64
"XBee (WiFi)" [mil]
  round 60 hole 35: 1(-433.07,354.33) 2(-433.07,275.59) 3(-433.07,196.85) 4(-433.07,118.11) 5(-433.07,39.37) 6(-433.07,-39.37) 7(-433.07,-118.11) 8(-433.07,-196.85) 9(-433.07,-275.59) 10(-433.07,-354.33) 11(433.07,-354.33) 12(433.07,-275.59) 13(433.07,-196.85) 14(433.07,-118.11) 15(433.07,-39.37) 16(433.07,39.37) 17(433.07,118.11) 18(433.07,196.85) 19(433.07,275.59) 20(433.07,354.33)
  silkscreen extent -492,-650 492,709, body extent -482,-650 482,650, height 299

## Part data
1 2 3 4 5 6 7 8 9: library part Opt_FYLS-0603UGC_LED_0603_Green_30mA_Diode_LED, Part Number=FYLS-0603UGC, Rating=30mA, Tolerance=5%, Distributor=Lomex, ID=Opt_FYLS-0603UGC_LED_0603_Green_30mA_Diode_LED, Link=http://lomex.hu/hu/webshop/#/page,0/stype,1/sidx,10/instock,0/search,95-03-08, Note=40mcd, Order Number=95-03-08, Package=0603, Price (HUF)=10, Type=LED
C1 C2 C16 C17 C24 C25: library part C3216X7R1E106K160AB, NI Part Number=-, Rating=25V, Tolerance=10%, Distributor=Farnell, ID=Cap_1206_10uF_25V_Chip, Link=http://hu.farnell.com/tdk/c3216x7r1e106k160ab/capacitor-mlcc-x7r-10uf-25v-1206/dp/2522133, NI PEN/DEB=-, Order Number=2522133, Package=1206, Part Number=C3216X7R1E106K160AB, Price (HUF)=109, Type="Chip Capacitor"
C3 C12 C13 C14 C15 C18 C26: library part CC0603KRX7R9BB104, NI Part Number=716340-01, Rating=50V, Tolerance=10%, Distributor=Lomex, ID=Cap_0603_100nF_50V_Chip, Link=http://lomex.hu/hu/webshop/#/page,0/search,82-06-23/stype,1/sidx,1, NI PEN/DEB=DEB, Order Number=82-06-23, Package=0603, Part Number=CC0603KRX7R9BB104, Price (HUF)=2.00, Type="Chip Capacitor"
C4 C19 C27: library part CL10C330JB8NNNC, NI Part Number=715511-01, Rating=50V, Tolerance=5%, Distributor=Lomex, ID=Cap_0603_33pF_50V_Chip, Link=http://lomex.hu/hu/webshop/#/page,0/search,82-09-74/stype,1/sidx,1, NI PEN/DEB=DEB, Order Number=82-09-74, Package=0603, Part Number=CL10C330JB8NNNC, Price (HUF)=2.00, Type="Chip Capacitor"
C5 C6 C7 C8 C20 C21 C22 C23 C28 C29 C30 C31: library part CL21A226MQQNNNG, NI Part Number=-, Rating=6.3V, Tolerance=20%, Distributor=Lomex, ID=Cap_0805_22uF_6.3V_Chip, Link=http://lomex.hu/hu/webshop/#/page,0/search,82-08-19/stype,1/sidx,1, NI PEN/DEB=-, Order Number=82-08-19, Package=0805, Part Number=CL21A226MQQNNNG, Price (HUF)=2.00, Type="Chip Capacitor"
C9: library part 885012109004, NI Part Number=-, Rating=6.3V, Tolerance=10%, Distributor=Würth, ID=1210_100uF_6.3V, Link=http://katalog.we-online.com/en/pbs/WCAP-CSGP-1210/885012209071?_ga=2.179279780.1074345052.1540129169-1833754390.1539103246, NI PEN/DEB=-, Order Number=885012109004, Package=1210, Part Number=885012109004, Price (HUF)=0, Type="Chip Capacitor"
C10 C11: library part CL10A105KA8NNNC, NI Part Number=-, Rating=25V, Tolerance=10%, Distributor=Lomex, ID=Cap_0603_1.0uF_25V_Chip, Link=http://lomex.hu/hu/webshop/#/page,0/search,82-07-86/stype,1/sidx,1, NI PEN/DEB=-, Order Number=82-07-86, Package=0603, Part Number=CL10A105KA8NNNC, Price (HUF)=2.00, Type="Chip Capacitor"
C32 C33 C34: library part CL10B333KB8NNNC, NI Part Number=716045-01, Rating=50V, Tolerance=10%, Distributor=Lomex, ID=Cap_0603_33nF_50V_Chip, Link=http://lomex.hu/hu/webshop/#/page,0/search,82-09-36/stype,1/sidx,1, NI PEN/DEB=DEB, Order Number=82-09-36, Package=0603, Part Number=CL10B333KB8NNNC, Price (HUF)=2.00, Type="Chip Capacitor"
C35: library part Cap_0805_47uF_6.3V_Chip, NI Part Number=-, Part Number=CL21A476MQYNNNE, Rating=6.3V, Tolerance=20%, Distributor=Lomex, ID=Cap_0805_47uF_6.3V_Chip, Link=http://lomex.hu/hu/webshop/#/page,0/search,82-08-66/stype,1/sidx,1, NI PEN/DEB=-, Order Number=82-08-66, Package=0805, Price (HUF)=2.00, Type="Chip Capacitor"
C36: library part Cap_0603_100nF_50V_Chip, NI Part Number=716340-01, Part Number=CC0603KRX7R9BB104, Rating=50V, Tolerance=10%, Distributor=Lomex, ID=Cap_0603_100nF_50V_Chip, Link=http://lomex.hu/hu/webshop/#/page,0/search,82-06-23/stype,1/sidx,1, NI PEN/DEB=DEB, Order Number=82-06-23, Package=0603, Price (HUF)=2.00, Type="Chip Capacitor"
C37 C38 C39: library part Cap_0603_33pF_50V_Chip, NI Part Number=715511-01, Part Number=CL10C330JB8NNNC, Rating=50V, Tolerance=5%, Distributor=Lomex, ID=Cap_0603_33pF_50V_Chip, Link=http://lomex.hu/hu/webshop/#/page,0/search,82-09-74/stype,1/sidx,1, NI PEN/DEB=DEB, Order Number=82-09-74, Package=0603, Price (HUF)=2.00, Type="Chip Capacitor"
C40: library part Cap_0603_18pF_50V_Chip, NI Part Number=715742-01, Part Number=CL10C180JB8NNNC, Rating=50V, Tolerance=5%, Distributor=Lomex, ID=Cap_0603_18pF_50V_Chip, Link=http://lomex.hu/hu/webshop/#/page,0/search,82-06-54/stype,1/sidx,1, NI PEN/DEB=DEB, Order Number=82-06-54, Package=0603, Price (HUF)=2.00, Type="Chip Capacitor"
D1: library part TZMC4V7GS08, NI Part Number=-, Rating=0.5W, Distributor=Lomex, ID=Dio_SOD-80_4.7V_0.5W_Zener, Link=http://lomex.hu/hu/webshop/#/page,0/search,85-00-95/stype,1/sidx,1, NI PEN/DEB=-, Order Number=85-00-95, Package=SOD-80, Part Number=TZMC4V7GS08, Price (HUF)=5, Type="Zener Diode"
D2: library part SMAJ12A, NI Part Number=-, Rating=400W, Distributor=Lomex, ID=Dio_SMA_14V_400W_Transient_Sup, Link=http://lomex.hu/hu/webshop/#/page,0/search,96-00-77/stype,1/sidx,1, NI PEN/DEB=-, Order Number=96-00-77, Package=SMA, Part Number=SMAJ12A, Price (HUF)=17, Type="Transient Voltage Suppressor"
D3 D5 D7: library part SMAJ5.0A, NI Part Number=-, Rating=400W, Tolerance=5%, Distributor=Lomex, ID=Dio_SMA_6.7V_400W_Transient_Sup, Link=http://lomex.hu/hu/webshop/#/search,96-00-75/stype,1, NI PEN/DEB=-, Order Number=96-00-75, Package=SMA, Part Number=SMAJ5.0A, Price (HUF)=20, Type="Transient Voltage Suppressor"
D4 D6 D8: library part BZV55C5V6, NI Part Number=-, Rating=0.5W, Distributor=Lomex, ID=Dio_SOD-80_5.6V_0.5W_Zener, Link=http://lomex.hu/hu/webshop/#/page,0/search,85-01-72/stype,1/sidx,1, NI PEN/DEB=-, Order Number=85-01-72, Package=SOD-80, Part Number=BZV55C5V6, Price (HUF)=5, Type="Zener Diode"
D9 D10 D11: library part Dio_SOT-23-3_40V_0.12A_Schottky_Series, NI Part Number=-, Part Number=BAS40-04, Rating=0.12A, Distributor=Lomex, ID=Dio_SOT-23-3_40V_0.12A_Schottky_Series, Link=http://lomex.hu/hu/webshop/#/page,0/search,83-02-49/stype,1/sidx,1, NI PEN/DEB=-, Order Number=83-02-49, Package=SOT-23-3, Price (HUF)=8, Type="Schottky Dual Diode"
D12 D13: library part SS34A, NI Part Number=-, Rating=3A, Distributor=Lomex, ID=Dio_SMA_40V_3A_Schottky, Link=http://lomex.hu/hu/webshop/#/page,0/search,83-02-56/stype,1/sidx,1, NI PEN/DEB=-, Order Number=83-02-56, Package=SMA, Part Number=SS34A, Price (HUF)=19, Type="Schottky Diode"
F1 F5 F6 F7: library part Oth_MC06CF.500_F_0603, NI Part Number=766324-01, Package=F_0603, Part Number=MC06CF.500, Rating=32VDC, Distributor=Farnell, ID=Oth_MC06CF.500_F_0603, Link=http://hu.farnell.com/multicomp/mc06cf-500/fuse-smd-0603-0-5a/dp/1841006, NI PEN/DEB=DEB, Order Number=1841006, Price (HUF)=125, Type="Very Fast Acting Fuse"
F2 F3 F8 F9: library part 0451003.MRL, NI Part Number=-, Package=F_2410, Rating=125V, Distributor=Lomex, ID=Oth_0451003.MRL_F_2410, Link=http://lomex.hu/hu/webshop/#page,0/search,44-02-68/stype,1, NI PEN/DEB=-, Order Number=44-02-68, Part Number=0451003.MRL, Price (HUF)=33, Type="Very Fast Acting Fuse"
F4: library part 1206SFS100F/63-2, NI Part Number=766260-01, Package=FUSE_1206, Rating=63VDC, Distributor=Farnell, ID=Oth_1206SFS100F/63-2_FUSE_1206, Link=http://hu.farnell.com/te-connectivity-raychem/1206sfs100f-63-2/fuse-smd-1206-1a/dp/1843826, NI PEN/DEB=DEB, Order Number=1843826, Part Number=1206SFS100F/63-2, Price (HUF)=239, Type="Slow Blow"
F10: library part Oth_0438001.WR_F_0603, NI Part Number=766308-01, Package=F_0603, Part Number=0438001.WR, Rating=32VDC, Distributor=Farnell, ID=Oth_0438001.WR_F_0603, Link=http://hu.farnell.com/littelfuse/0438001-wr/fuse-smd-1a-0603-fast-acting-full/dp/2413034?ost=0438001.WR&selectedCategoryId=&categoryNameResp=%25C3%2596sszes%2Bkateg%25C3%25B3ria&searchView=table&iscrfnonsku=false, NI PEN/DEB=DEB, Order Number=2413034, Price (HUF)=142, Type="Very Fast Acting Fuse"
IC1: "Single Output LDO", NI Part Number=-, Package=SOT-223, Distributor=TI, ID=IC_TLV1117LV33DCYR_SOT-223, Link=http://www.ti.com/product/TLV1117LV?keyMatch=TLV1117LV33DCYR&tisearch=Search-EN-Everything, NI PEN/DEB=-, Note=TLV1117, Order Number=TLV1117LV33DCYR, Part Number=TLV1117LV33DCYR, Price (HUF)=64, Type="Single Output LDO"
IC2 IC3 IC4 IC5: library part 14SegmentDisplaySingle, "14SegmentDisplaySingle", Distributor=Farnell, Link=http://hu.farnell.com/kingbright/kcpsc04-106/led-alpha-num-10-16mm-orange/dp/2449716, Type=14SegmentDisplaySingle
J1 J2: "WR-WTB 2.00mm Male Vertical Shrouded Header, 2p", NI Part Number=-, ComponentLink1Description=Manufacturer, ComponentLink1URL=http://www.we-online.de, ComponentLink2Description=Datasheet, ComponentLink2URL=http://katalog.we-online.de/em/datasheet/6200xx11622.pdf, Distributor=Würth, ID="WE 1x2 Vertical THT", Link=http://katalog.we-online.de/em/datasheet/6200xx11622.pdf, NI PEN/DEB=-, Note="Positive Lock", Order Number=62000211622, Package=62000211622, Part Number=62000211622, Pin Number=2, Pitch="2.00 mm", Price (HUF)=0, Published Date="June 2017", Publisher="Wurth Elektronik", Type="Header WE 2-way"
J3 J6 J10 J11 J13 J14: "WR-WTB 2.00mm Male Vertical Shrouded Header, 3p", NI Part Number=-, ComponentLink1Description=Manufacturer, ComponentLink1URL=http://www.we-online.de, ComponentLink2Description=Datasheet, ComponentLink2URL=http://katalog.we-online.de/em/datasheet/6200xx11622.pdf, Distributor=Würth, ID="WE 1x3 Vertical THT", Link=http://katalog.we-online.de/em/datasheet/6200xx11622.pdf, NI PEN/DEB=-, Note="Positive Lock", Order Number=62000311622, Package=62000311622, Part Number=62000311622, Pin Number=3, Pitch="2.00 mm", Price (HUF)=0, Published Date="June 2017", Publisher="Wurth Elektronik", Type="Header WE 3-way"
J4 J5: library part "1217861-1 TERMINAL", NI Part Number=-, Package="TAB 6.35MM x 0.81MM", Distributor=Farnell, ID="Con_1217861-1 TERMINAL", Link=http://hu.farnell.com/te-connectivity-amp/1217861-1/terminal-tab-6-35mm-x-0-81mm-solder/dp/1924184?ost=1924184&selectedCategoryId=&categoryName=%C3%96sszes+kateg%C3%B3ria&categoryNameResp=%C3%96sszes+kateg%C3%B3ria, NI PEN/DEB=-, Order Number=1924184, Part Number="1217861-1 TERMINAL", Price (HUF)=22, Type=TAB
J7 J15: "WR-WTB 2.00mm Male Vertical Shrouded Header, 4p", NI Part Number=-, ComponentLink1Description=Manufacturer, ComponentLink1URL=http://www.we-online.de, ComponentLink2Description=Datasheet, ComponentLink2URL=http://katalog.we-online.de/em/datasheet/6200xx11622.pdf, Distributor=Würth, ID="WE 1x4 Vertical THT", Link=http://katalog.we-online.de/em/datasheet/6200xx11622.pdf, NI PEN/DEB=-, Note="Positive Lock", Order Number=62000411622, Package=62000411622, Part Number=62000411622, Pin Number=4, Pitch="2.00 mm", Price (HUF)=0, Published Date="June 2017", Publisher="Wurth Elektronik", Type="Header WE 4-way"
J8 J9: "WR-WTB 2.00mm Male Dual Row Vertical Shrouded Header with positive locking, 20p", NI Part Number=-, ComponentLink1Description=Manufacturer, ComponentLink1URL=http://www.we-online.de, ComponentLink2Description=Datasheet, ComponentLink2URL=http://katalog.we-online.de/em/datasheet/6240xx21622.pdf, Distributor=Würth, ID="WE 2x10 Vertical THT", Link=http://katalog.we-online.de/em/datasheet/6240xx21622.pdf, NI PEN/DEB=-, Note="Positive Lock", Order Number=62402021622, Package=62402021622, Part Number=62402021622, Pin Number=20, Pitch="2.00 mm", Price (HUF)=0, Published Date="June 2017", Publisher="Wurth Elektronik", Type="Header WE 20-way"
J12: "WR-WTB 2.00mm Male Vertical Shrouded Header, 6p", NI Part Number=-, ComponentLink1Description=Manufacturer, ComponentLink1URL=http://www.we-online.de, ComponentLink2Description=Datasheet, ComponentLink2URL=http://katalog.we-online.de/em/datasheet/6200xx11622.pdf, Distributor=Würth, ID="WE 1x6 Vertical THT", Link=http://katalog.we-online.de/em/datasheet/6200xx11622.pdf, NI PEN/DEB=-, Note="Positive Lock", Order Number=62000611622, Package=62000611622, Part Number=62000611622, Pin Number=6, Pitch="2.00 mm", Price (HUF)=0, Published Date="June 2017", Publisher="Wurth Elektronik", Type="Header WE 6-way"
L1 L2 L3: "No Description Available", Mfr_Name="Bourns Electronics", Copyright="Copyright (C) 2023 Ultra Librarian. All rights reserved.", Manufacturer_Part_Number=SRP7028A-6R8M, RefDes=RefDes, Type=DEV
Q1 Q7 Q8: "P-Channel Power MOSFET", NI Part Number=-, Package=D2PAK-2, Rating=31A, Distributor=Lomex, ID=Tra_D2PAK-2_55V_31A_P-FET, Link=http://lomex.hu/hu/webshop/#/page,0/stype,1/sidx,10/instock,0/search,86-02-47, NI PEN/DEB=-, Order Number=86-02-47, Part Number=IRF5305SPBF, Price (HUF)=230, Type=P-FET
Q2 Q3 Q4 Q5 Q6 Q9 Q10: "N-Channel Power MOSFET", NI Part Number=-, Package=SOT-23-3, Rating=4A, Distributor=Lomex, ID=Tra_SOT-23-3_30V_4A_N-FET, Link=http://lomex.hu/hu/webshop/#/page,0/stype,1/sidx,10/instock,0/search,86-01-57, NI PEN/DEB=-, Order Number=86-01-57, Part Number=SI2306BDS-T1-E3, Price (HUF)=83, Type=N-FET
R1 R8 R9 R25 R26 R27 R28 R29 R30 R31 R32: library part CR-03FL7---10K, NI Part Number=713771-01, Rating=0.1W, Tolerance=1%, Distributor=Lomex, ID=Res_0603_10K0_0.1W_Chip, Link=http://lomex.hu/hu/webshop/#/page,0/search,80-11-68/stype,1/sidx,1, NI PEN/DEB=DEB, Order Number=80-11-68, Package=0603, Part Number=CR-03FL7---10K, Price (HUF)=0.80, Type="Chip Resistor"
R2 R33 R38: library part CR-03JL7---39K, NI Part Number=613245-01, Rating=0.1W, Tolerance=5%, Distributor=Lomex, ID=Res_0603_39K0_0.1W_Chip, Link=http://lomex.hu/hu/webshop/#/page,0/search,81-10-45/stype,1/sidx,1, NI PEN/DEB=DEB, Order Number=81-10-45, Package=0603, Part Number=CR-03JL7---39K, Price (HUF)=0.80, Type="Chip Resistor"
R3: library part CR-03FL7--220K, NI Part Number=612705-01, Rating=0.1W, Tolerance=1%, Distributor=Lomex, ID=Res_0603_220K_0.1W_Chip, Link=http://lomex.hu/hu/webshop/#/page,0/search,80-11-75/stype,1/sidx,1, NI PEN/DEB=DEB, Order Number=80-11-75, Package=0603, Part Number=CR-03FL7--220K, Price (HUF)=0.80, Type="Chip Resistor"
R4 R10 R11 R12 R19 R20: library part CR-03FL7--360R, NI Part Number=-, Rating=0.1W, Tolerance=1%, Distributor=Lomex, ID=Res_0603_360R_0.1W_Chip, Link=http://lomex.hu/hu/webshop/#/page,0/search,80-13-12/stype,1/sidx,1, NI PEN/DEB=-, Order Number=80-13-12, Package=0603, Part Number=CR-03FL7--360R, Price (HUF)=0.80, Type="Chip Resistor"
R5 R6 R36 R37 R41 R42 R46 R47 R48: library part CR-03FL7---30K, NI Part Number=612699-01, Rating=0.1W, Tolerance=1%, Distributor=Lomex, ID=Res_0603_30K0_0.1W_Chip, Link=http://lomex.hu/hu/webshop/#/page,0/search,80-14-53/stype,1/sidx,1, NI PEN/DEB=DEB, Note="NI: not in stock", Order Number=80-14-53, Package=0603, Part Number=CR-03FL7---30K, Price (HUF)=0.80, Type="Chip Resistor"
R7: library part CR-03JL7--240R, NI Part Number=612640-01, Rating=0.1W, Tolerance=5%, Distributor=Lomex, ID=Res_0603_240R_0.1W_Chip, Link=http://lomex.hu/hu/webshop/#/page,0/search,81-12-26/stype,1/sidx,1, NI PEN/DEB=DEB, Note="NI: not in stock", Order Number=81-12-26, Package=0603, Part Number=CR-03JL7--240R, Price (HUF)=0.80, Type="Chip Resistor"
R13 R14 R15 R21 R22 R53 R54: library part CR-03FL7----1K, NI Part Number=713776-01, Rating=0.1W, Tolerance=1%, Distributor=Lomex, ID=Res_0603_1K00_0.1W_Chip, Link=http://lomex.hu/hu/webshop/#/page,0/search,80-11-59/stype,1/sidx,1, NI PEN/DEB=DEB, Order Number=80-11-59, Package=0603, Part Number=CR-03FL7----1K, Price (HUF)=0.80, Type="Chip Resistor"
R16 R17 R18 R23 R24 R34 R39 R55 R56 R57 R58: library part CR-03FL7--390K, NI Part Number=-, Rating=0.1W, Tolerance=1%, Distributor=Lomex, ID=Res_0603_390K_0.1W_Chip, Link=http://lomex.hu/hu/webshop/#/page,0/search,80-13-26/stype,1/sidx,1, NI PEN/DEB=-, Order Number=80-13-26, Package=0603, Part Number=CR-03FL7--390K, Price (HUF)=0.80, Type="Chip Resistor"
R35 R40: library part CR-03FL7--560R, NI Part Number=612556-01, Rating=0.1W, Tolerance=1%, Distributor=Lomex, ID=Res_0603_560R_0.1W_Chip, Link=http://lomex.hu/hu/webshop/#/page,0/search,80-14-41/stype,1/sidx,1, NI PEN/DEB=DEB, Note="NI: not in stock", Order Number=80-14-41, Package=0603, Part Number=CR-03FL7--560R, Price (HUF)=0.80, Type="Chip Resistor"
R43 R49 R50 R51 R52: library part CR-03FL7---91K, NI Part Number=612775-01, Rating=0.1W, Tolerance=1%, Distributor=Lomex, ID=Res_0603_91K0_0.1W_Chip, Link=http://lomex.hu/hu/webshop/#/page,0/search,80-14-58/stype,1/sidx,1, NI PEN/DEB=PEN, Note="NI: 90.9k", Order Number=80-14-58, Package=0603, Part Number=CR-03FL7---91K, Price (HUF)=0.80, Type="Chip Resistor"
R44 R45: library part CR-03FL7---20K, NI Part Number=711809-01, Rating=0.1W, Tolerance=1%, Distributor=Lomex, ID=Res_0603_20K0_0.1W_Chip, Link=http://lomex.hu/hu/webshop/#/page,0/search,80-14-52/stype,1/sidx,1, NI PEN/DEB=DEB, Order Number=80-14-52, Package=0603, Part Number=CR-03FL7---20K, Price (HUF)=0.80, Type="Chip Resistor"
RA1 RB1 RC1 RD1: library part Res_0603_220K_0.1W_Chip, NI Part Number=612705-01, Part Number=CR-03FL7--220K, Rating=0.1W, Tolerance=1%, Distributor=Lomex, ID=Res_0603_220K_0.1W_Chip, NI PEN/DEB=DEB, Order Number=80-11-75, Package=0603, Price (HUF)=0.80, Type="Chip Resistor"
  RA1: Link=http://lomex.hu/hu/webshop/#/page,0/search,80-11-75/stype,1/sidx,1
  RB1: Link=http://lomex.hu/hu/webshop/#/search,80-45-26/stype,1
  RC1: Link=http://lomex.hu/hu/webshop/#/search,80-45-61/stype,1
  RD1: Link=http://lomex.hu/hu/webshop/#/search,80-49-35/stype,1
Ris1: library part Res_0603_4K70_0.1W_Chip, NI Part Number=713782-01, Part Number=CR-03FL7---4K7, Rating=0.1W, Tolerance=1%, Distributor=Lomex, ID=Res_0603_4K70_0.1W_Chip, Link=http://lomex.hu/hu/webshop/#/page,0/search,80-11-85/stype,1/sidx,1, NI PEN/DEB=PEN, Order Number=80-11-85, Package=0603, Price (HUF)=0.80, Type="Chip Resistor"
Ris2: library part Res_0603_200K_0.1W_Chip, NI Part Number=713614-01, Part Number=CR-03FL7--200K, Rating=0.1W, Tolerance=1%, Distributor=Lomex, ID=Res_0603_200K_0.1W_Chip, Link=http://lomex.hu/hu/webshop/#/page,0/search,80-13-51/stype,1/sidx,1, NI PEN/DEB=PEN, Order Number=80-13-51, Package=0603, Price (HUF)=0.80, Type="Chip Resistor"
S1 S2 S3 S4: library part FSM2JSMA, NI Part Number=-, Package=SWITCH, Rating=50mA, Distributor=Lomex, ID=Oth_FSM2JSMA_SWITCH, Link=http://lomex.hu/hu/webshop/#/page,0/stype,1/sidx,6/search,45-05-42, NI PEN/DEB=-, Note="4 Pin", Order Number=45-05-42, Part Number=FSM2JSMA, Price (HUF)=41, Type=Button
SW2: "No Description Available", Mfr_Name=Multicomp, Copyright="Copyright (C) 2023 Ultra Librarian. All rights reserved.", Manufacturer_Part_Number=MCRM3HAF-10R-V-B, RefDes=RefDes, Type=DEV
U1: "https://www.st.com/resource/en/user_manual/um2581-stm32l5-nucleo144-board-mb1361-stmicroelectronics.pdf", Name="Nucleo L552", Reference=NUCLEO, Supplier=Tanszék
U2 U6 U7: "No Description Available", Mfr_Name="Texas Instruments", Copyright="Copyright (C) 2023 Ultra Librarian. All rights reserved.", Manufacturer_Part_Number=TPS564257DRLR, RefDes=RefDes, Type=DEV
U3: "LSM6DSL inertial module adapter", Name="MKI178V1 LSM6DSL inertial module adapter", Reference=511-STEVAL-MKI178V1, Supplier=Mouser
U4: library part XBee, Distributor=Farnell, Link=http://hu.farnell.com/digi-international/xb2b-wfut-001/mod-xbee-2-4ghz-wifi-u-fl-conn/dp/2343884?ost=2343884, Order Number=2343884, Part Number=XB2B-WFUT-001, Price (HUF)=12000
U5: "SiLabs Thunderboard Sense 2 module"
U8: library part IC_MAX6954AAX+_TSSOP-36, "16 Segment LED Driver", NI Part Number=-, Package=TSSOP-36, Distributor=Farnell, ID=IC_MAX6954AAX+_TSSOP-36, Link=http://hu.farnell.com/maxim-integrated-products/max6954aax/driver-led-16x7seg-8x16seg-128/dp/2113136, NI PEN/DEB=-, Note=MAX6954, Order Number=2113136, Part Number=MAX6954AAX+, Price (HUF)=7470, Type="16 Segment LED Driver"

## Nets (pads, with @x,y where several pads share a name; then routed paths per layer and width w, separated by ;. In a path a pad name is that pad's centre, name@x,y a point inside that pad or via, vN(x,y) a via of type N, cw(c..) or ccw(c..) an arc to the next point about the centre after c; other vN are vias at no path point)
3V3: D9.2 D10.2 D11.2 F4.2 F5.1 F6.1 F10.1 J10.1 J11.1 J13.1 J14.1 R27.2 R28.2 R29.2 R30.2 S1.1 S2.1 S3.1 S4.1
3V3_DISP_FUSE: C35.2 C36.2 F10.2 U8.19 U8.21
5V: 3.2 4.2 5.2 6.2 7.2 C9.2 C10.2 D3.1 F1.1 F3.2 F7.1 IC1.3 J7.1 J8.11 J8.12 J9.11 J9.12 J15.1
5V_MCU: F1.2 U1.6
8V4_F: D5.1 F8.2 J3.1
8V4_R: D7.1 F9.2 J6.1
ILEF: J8.9 U1.57
ILER: J9.9 U1.63
/CS: C39.2 U8.3
AD_MISO: J8.4 J9.4 U1.85
AD_MOSI: J8.3 J9.3 U1.125
AD_SCK: J8.13 J9.13 U1.83
ADCF1: J8.14 U1.82
ADCF2: J8.15 U1.69
ADCF3: J8.1 U1.137
ADCF4: J8.2 U1.117
ADCR1: J9.14 U1.115
ADCR2: J9.15 U1.113
ADCR3: J9.1 U1.118
ADCR4: J9.2 U1.120
AIN1: J10.2 U1.109
AIN2: J13.2 U1.107
AIN3: J11.2 U1.32
AIN4: J14.2 U1.96
BATT: J12.5 U1.38
BUTTON1: C12.2 R25.2 S1.2 U1.116
BUTTON2: C13.2 R26.2 S2.2 U1.112
CH_A: J15.3 R44.2
CH_B: J15.2 R45.2
CHA: C33.2 D10.3 R44.1 R47.2 U1.37
CHB: C34.2 D11.3 R45.1 R48.2 U1.34
CLK: C37.2 U1.1 U8.5
CURR: J12.6 U1.36
DIN: C38.2 U1.3 U8.6
DRIVE_EN: J12.1 U1.130
F_INF_/OE: J8.10 U1.4
F_LED_/OE: J8.17 U1.45
F_LED_LE: J8.7 U1.55
FAN1: R53.1
FAN1_PWR: D12.2 J1.1 Q7.3 R56.2
FAN2: R54.1
FAN2_PWR: D13.2 J2.1 Q8.3 R58.2
FB: J12.4 U1.108
GND: C1.1 C2.1 C3.1 C5.1 C6.1 C7.1 C8.1 C9.1 C10.1 C11.1 C12.1 C13.1 C14.1 C15.1 C16.1 C17.1 C18.1 C20.1 C21.1 C22.1 C23.1 C24.1 C25.1 C26.1 C28.1 C29.1 C30.1 C31.1 C32.1 C33.1 C34.1 C35.1 C36.1 C37.1 C38.1 C39.1 C40.1 D2.2 D3.2 D4.2 D5.2 D6.2 D7.2 D8.2 D9.1 D10.1 D11.1 IC1.1 J1.2 J2.2 J3.3 J5.1 J6.3 J7.4 J8.5 J8.6 J8.16 J8.19 J8.20 J9.5 J9.6 J9.16 J9.19 J9.20 J10.3 J11.3 J13.3 J14.3 J15.4 Q2.2 Q3.2 Q4.2 Q5.2 Q6.2 Q9.2 Q10.2 R1.1 R4.1 R5.1 R6.1 R7.1 R16.1 R17.1 R18.1 R23.1 R24.1 R25.1 R26.1 R31.1 R32.1 R35.1 R36.1 R37.1 R40.1 R41.1 R42.1 R46.1 R47.1 R48.1 R55.1 R56.1 R57.1 R58.1 Ris2.1 SW2.2 SW2.5 U1.19 U1.20 U1.22 U1.49 U1.60 U1.71 U1.72 U1.81 U1.92 U1.104 U1.111 U1.126 U1.135 U1.143 U1.144 U2.3 U3.13 U4.10 U5.1 U6.3 U7.3 U8.16 U8.18
IMU_3V3: F5.2 R8.2 R9.2 U3.1 U3.2 U3.17 U3.19 U3.24
INF/LED_MOSI: J8.18 J9.18 U1.40
INF/LED_SCK: J8.8 J9.8 U1.97
IOER: J9.10 U1.65
ISET: RA1.2 RB1.2 RC1.2 RD1.2 Ris1.2 U8.17
LED1: R21.1 U1.50
LED2: R22.1 U1.62
LSB: U3.22
LV_BATT: C32.2 D9.3 R43.1 R46.2 U1.87
LV_BATT_LED: R14.1 U1.132
M_PWM1: J12.2 U1.47
M_PWM2: J12.3 U1.48
MCU_LED: R15.1 U1.129
MOT_BATT_LED: R13.1 U1.122
Net1_1: 1.1 R4.2
Net1_2: 1.2 C4.2 C5.2 C6.2 C7.2 C8.2 F3.1 L1.1 R3.1
Net2_1: 2.1 R7.2
Net3_1: 3.1 R10.2
Net4_1: 4.1 R11.2
Net5_1: 5.1 R12.2
Net6_1: 6.1 R19.2
Net7_1: 7.1 R20.2
Net8_1: 8.1 R35.2
Net8_2: 8.2 C19.2 C20.2 C21.2 C22.2 C23.2 F8.1 L2.1 R34.2
Net9_1: 9.1 R40.2
Net9_2: 9.2 C27.2 C28.2 C29.2 C30.2 C31.2 F9.1 L3.1 R39.2
NetC4_1: C4.1 R3.2 R6.2 U2.6
NetC19_1: C19.1 R34.1 R37.2 U6.6
NetC27_1: C27.1 R39.1 R42.2 U7.6
NetD1_1: D1.1 F2.1 Q1.2
NetD1_2: D1.2 Q1.1 R1.2
NetD4_1: D4.1 R2.1 R5.2 U2.5
NetD6_1: D6.1 R33.1 R36.2 U6.5
NetD8_1: D8.1 R38.1 R41.2 U7.5
NetL1_2: L1.2 U2.2
NetL2_2: L2.2 U6.2
NetL3_2: L3.2 U7.2
NetQ1_3: Q1.3
NetQ2_1: Q2.1 R13.2 R16.2
NetQ2_3: Q2.3 R10.1
NetQ3_1: Q3.1 R14.2 R17.2
NetQ3_3: Q3.3 R11.1
NetQ4_1: Q4.1 R15.2 R18.2
NetQ4_3: Q4.3 R12.1
NetQ5_1: Q5.1 R21.2 R23.2
NetQ5_3: Q5.3 R19.1
NetQ6_1: Q6.1 R22.2 R24.2
NetQ6_3: Q6.3 R20.1
NetQ7_1: Q7.1 R49.1 R51.2
NetQ8_1: Q8.1 R50.1 R52.2
NetQ9_1: Q9.1 R53.2 R55.2
NetQ9_3: Q9.3 R51.1
NetQ10_1: Q10.1 R54.2 R57.2
NetQ10_3: Q10.3 R52.1
NetRis1_1: Ris1.1 Ris2.2
O0: IC2.14 IC3.10 IC5.10 U8.7
O1: IC4.14 U8.8
O2: IC2.10 IC3.14 IC4.10 U8.9
O3: IC5.14 U8.10
O4: IC2.11 IC3.11 IC4.11 IC5.11 U8.11
O5: IC2.6 IC3.6 IC4.6 IC5.6 U8.12
O6: IC2.7 IC3.7 IC4.7 IC5.7 U8.13
O7: U8.14
O8: IC2.8 IC3.8 IC4.8 IC5.8 U8.15
O9: IC2.16 IC3.16 IC4.16 IC5.16 U8.22
O10: IC2.1 IC3.1 IC4.1 IC5.1 U8.23
O11: IC2.12 IC3.12 IC4.12 IC5.12 U8.24
O12: IC2.9 IC3.9 IC4.9 IC5.9 U8.25
O13: IC2.15 IC3.15 IC4.15 IC5.15 U8.26
O14: IC2.13 IC3.13 IC4.13 IC5.13 U8.27
O15: IC2.4 IC3.4 IC4.4 IC5.4 U8.28
O16: IC2.3 IC3.3 IC4.3 IC5.3 U8.29
O17: IC2.2 IC3.2 IC4.2 IC5.2 U8.30
O18: IC2.5 IC3.5 IC4.5 IC5.5 U8.31
OSC: C40.2 U8.20
PORT_A: RA1.1 U8.1
PORT_B: RB1.1 U8.2
PORT_C: RC1.1 U8.34
PORT_D: RD1.1 U8.35
R_LED_/OE: J9.17 U1.68
R_LED_LE: J9.7 U1.66
RADIO_5V: F7.2 U5.18
RADIO_RX: U1.28 U5.14
RADIO_TX: U1.30 U5.12
RC_PWM_M: J7.3
RC_PWM_S: J7.2
RESET_BUTTON: C14.2 R31.2 S3.2 U1.59
ROTARY1: R27.1 SW2.1 U1.119
ROTARY2: R28.1 SW2.4 U1.128
ROTARY3: R29.1 SW2.3 U1.121
ROTARY4: R30.1 SW2.6 U1.127
S_PWM_F: J3.2 U1.95
S_PWM_R: J6.2
SCL: R9.1 U1.75 U3.20
SDA: R8.1 U1.77 U3.21
SET_BUTTON: C15.2 R32.2 S4.2 U1.58
SPI3_MISO: U1.2
VBAT: J4.1
VBAT_Prot: C1.2 C2.2 C3.2 C16.2 C17.2 C18.2 C24.2 C25.2 C26.2 D2.1 D12.1 D13.1 F2.2 Q7.2 Q8.2 R2.2 R33.2 R38.2 R43.2 R49.2 R50.2 U2.1 U6.1 U7.1
Vout: 2.2 C11.2 F4.1 IC1.2 IC1.4
XBEE_3V3: F6.2 U4.1
XBEE_RX: U1.41 U4.3
XBEE_TX: U1.43 U4.2
pads on no net: J8.M1 J9.M1 U1.5 U1.7 U1.8 U1.9 U1.10 U1.11 U1.12 U1.13 U1.14 U1.15 U1.16 U1.17 U1.18 U1.21 U1.23 U1.24 U1.25 U1.26 U1.27 U1.29 U1.31 U1.33 U1.35 U1.39 U1.42 U1.44 U1.46 U1.51 U1.52 U1.53 U1.54 U1.56 U1.61 U1.64 U1.67 U1.70 U1.73 U1.74 U1.76 U1.78 U1.79 U1.80 U1.84 U1.86 U1.88 U1.89 U1.90 U1.91 U1.93 U1.94 U1.98 U1.99 U1.100 U1.101 U1.102 U1.103 U1.105 U1.106 U1.110 U1.114 U1.123 U1.124 U1.131 U1.133 U1.134 U1.136 U1.138 U1.139 U1.140 U1.141 U1.142 U2.4 U3.3 U3.4 U3.5 U3.6 U3.7 U3.8 U3.9 U3.10 U3.11 U3.12 U3.14 U3.15 U3.16 U3.18 U3.23 U4.4 U4.5 U4.6 U4.7 U4.8 U4.9 U4.11 U4.12 U4.13 U4.14 U4.15 U4.16 U4.17 U4.18 U4.19 U4.20 U5.2 U5.3 U5.4 U5.5 U5.6 U5.7 U5.8 U5.9 U5.10 U5.11 U5.13 U5.15 U5.16 U5.17 U5.19 U5.20 U6.4 U7.4 U8.4 U8.32 U8.33 U8.36

## Silkscreen, mask and mechanical layers (free items; w line width, h text height)
Mechanical 1:
  the board outline again, w0.2

## Text inside footprints (layer, text, board x,y; h text height)
J8: Top Overlay "20" at 326.5,197.5 h0.89 r180; Top Overlay "10" at 326.5,192.5 h0.89 r180
J9: Top Overlay "20" at 326.5,210 h0.89 r180; Top Overlay "10" at 326.5,205 h0.89 r180
SW2: Top Overlay "*" at 366.023,-13.523 h1.27 r180; Mechanical 13 "*" at 363.737,-14.056 h1.27 r180
U1: Top Overlay "CN11" at 72.73,104.278 h1.52; Top Overlay "CN12" at 133.69,104.278 h1.52
U4: Top Overlay "WiFi" at 17.38,118.024 h3.05 r90; Top Overlay "XBee" at 14.5,114 h5.08 r90